# Altium PCB 2016_AdvBeacon.PCBDOC
Units mil, origin at the board's own origin, x right, y up, seen from the top; angles counter-clockwise.
Board outline 2585.03 x 2560 mil, 4 copper layers (1-TOP, 2-GND, 3-SIGNAL, 4-BOT), stack 68 mil thick; 70 components, 47 nets, 263 pads, 155 vias.
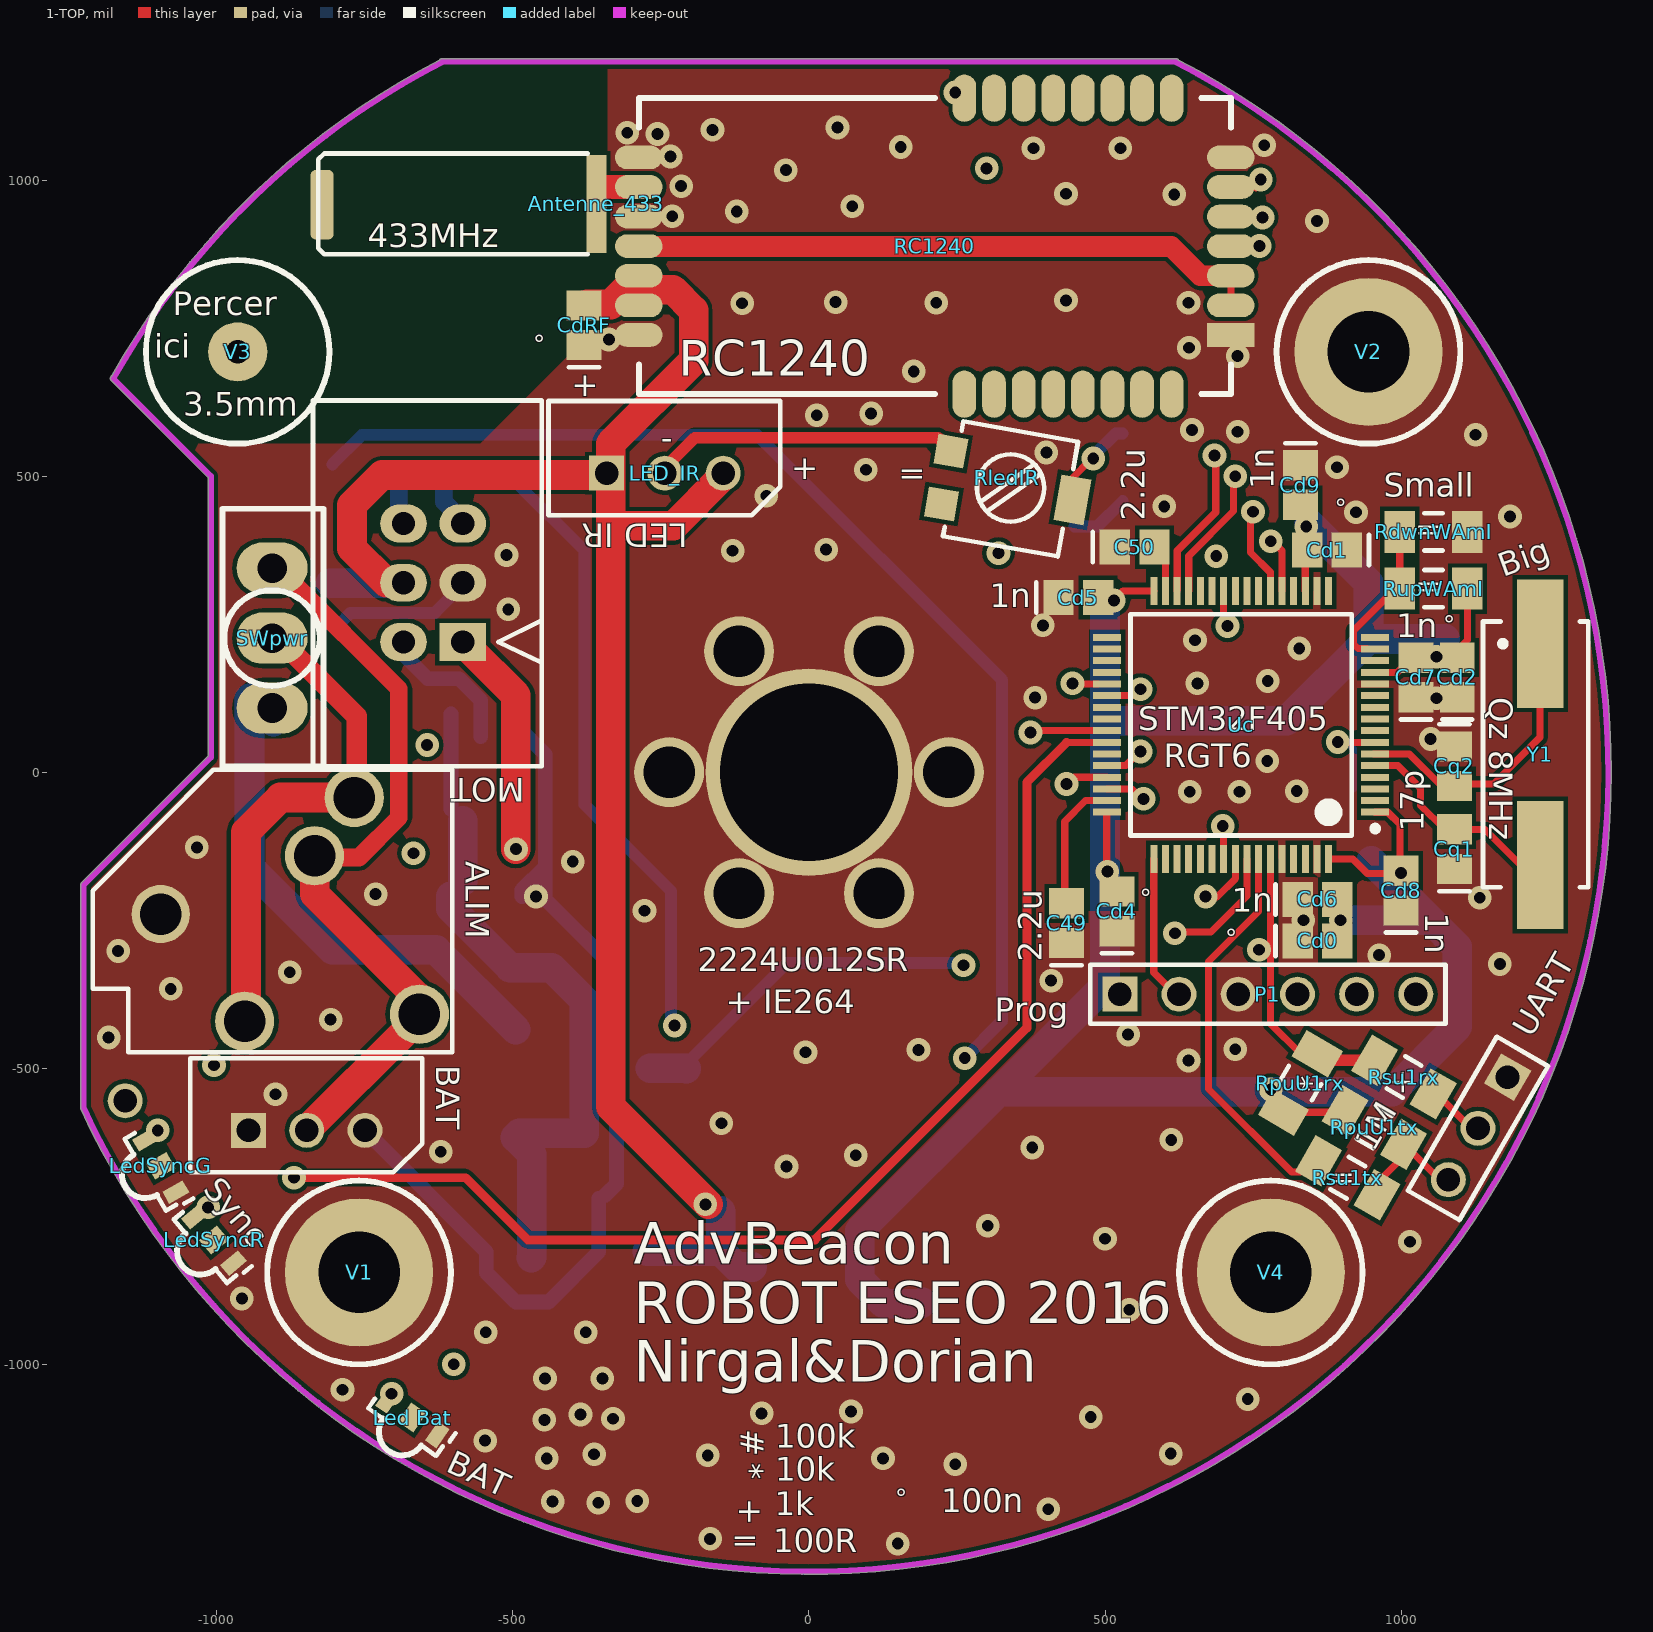
[diagram p0: 1-TOP view]
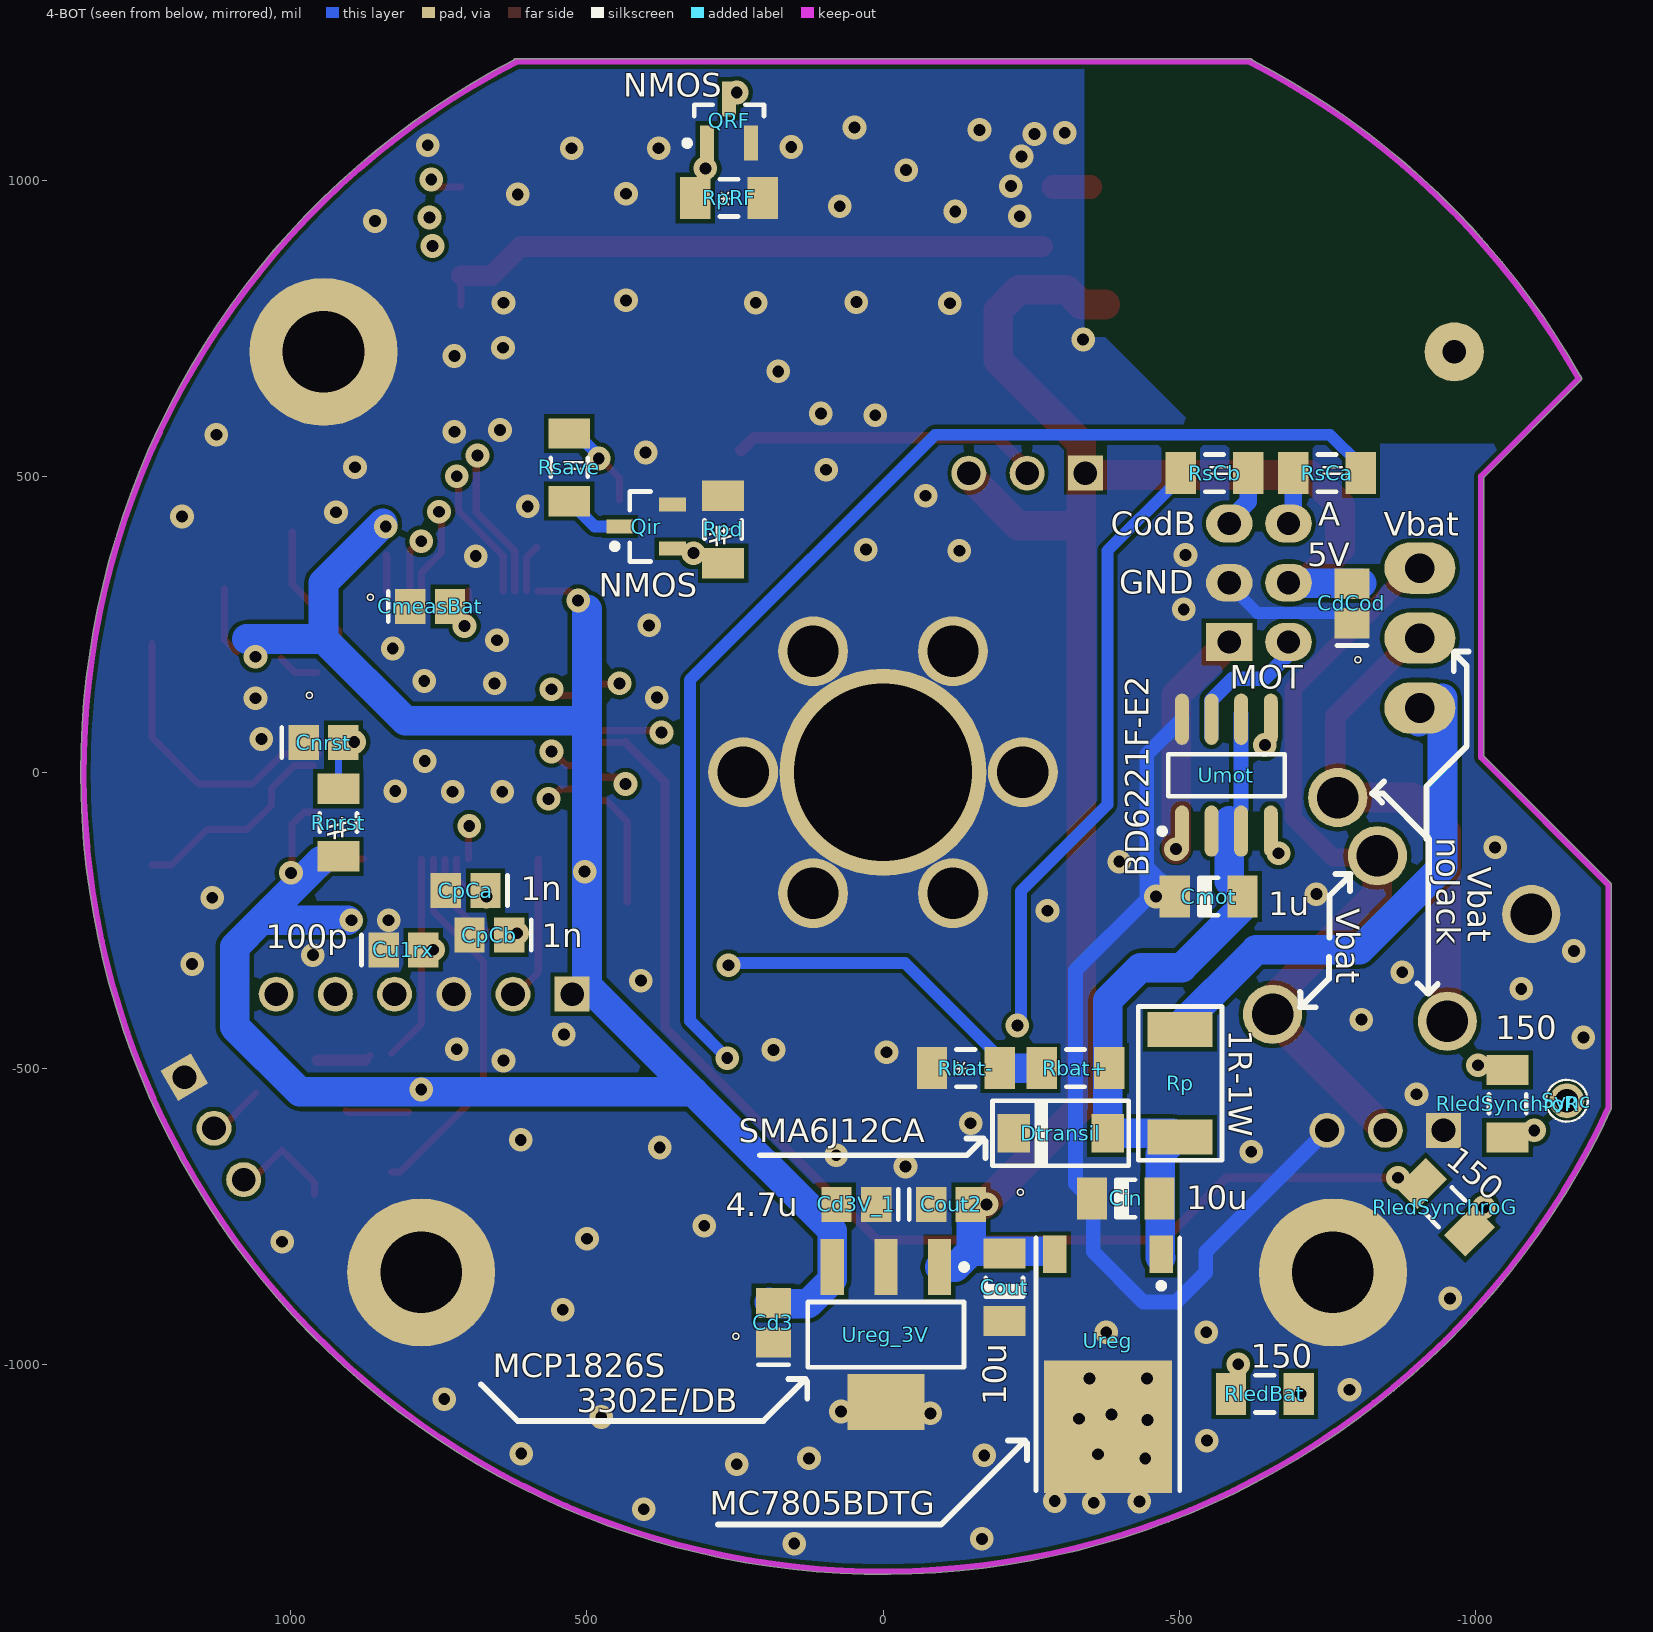
[diagram p1: 4-BOT view, seen from below]
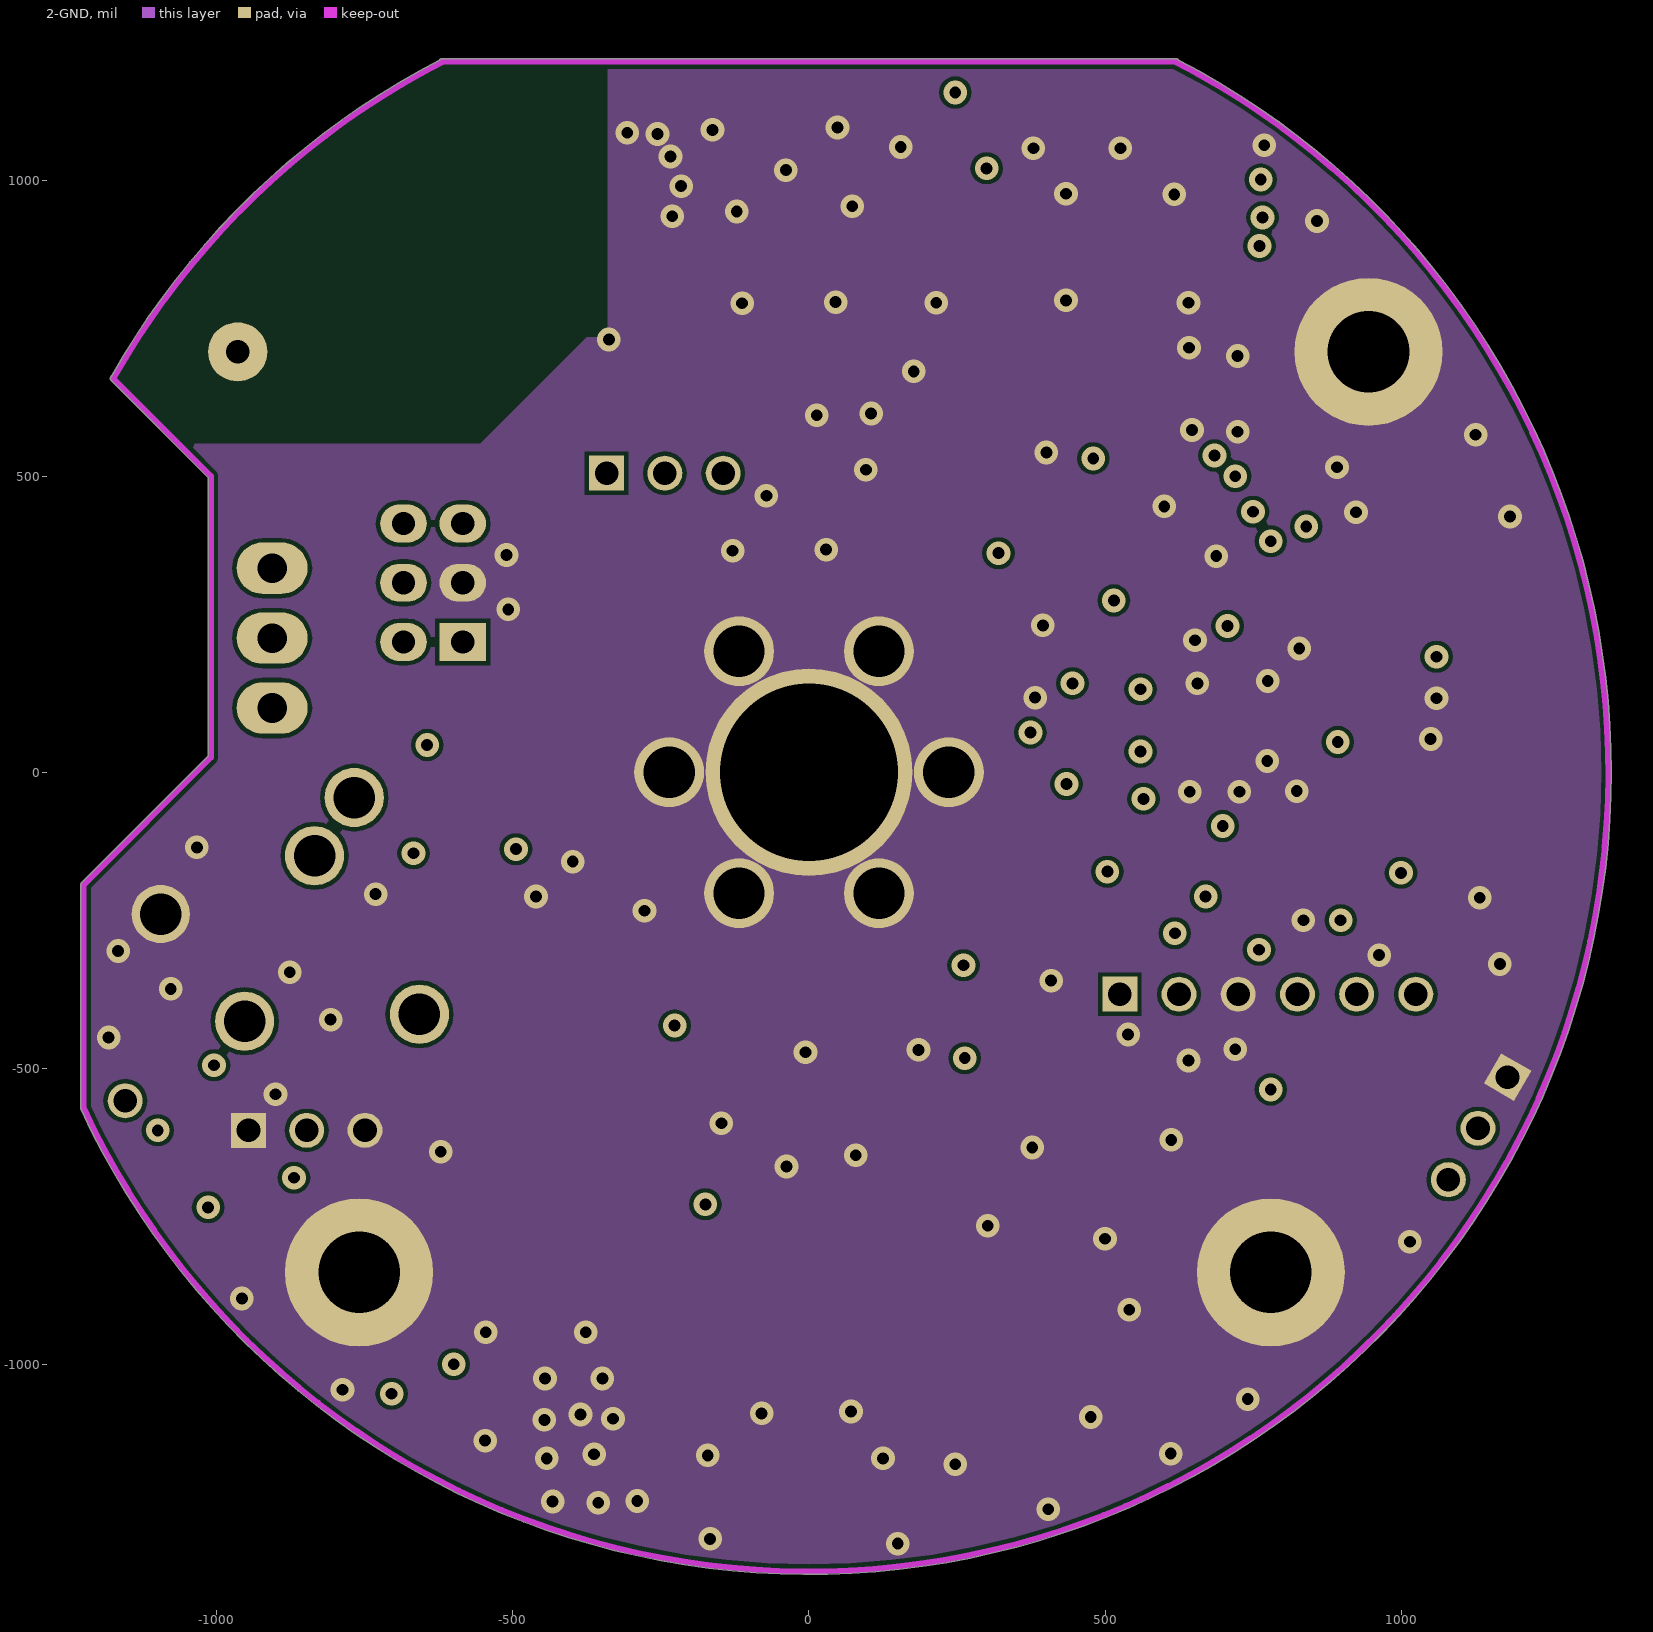
[diagram p2: 2-GND]
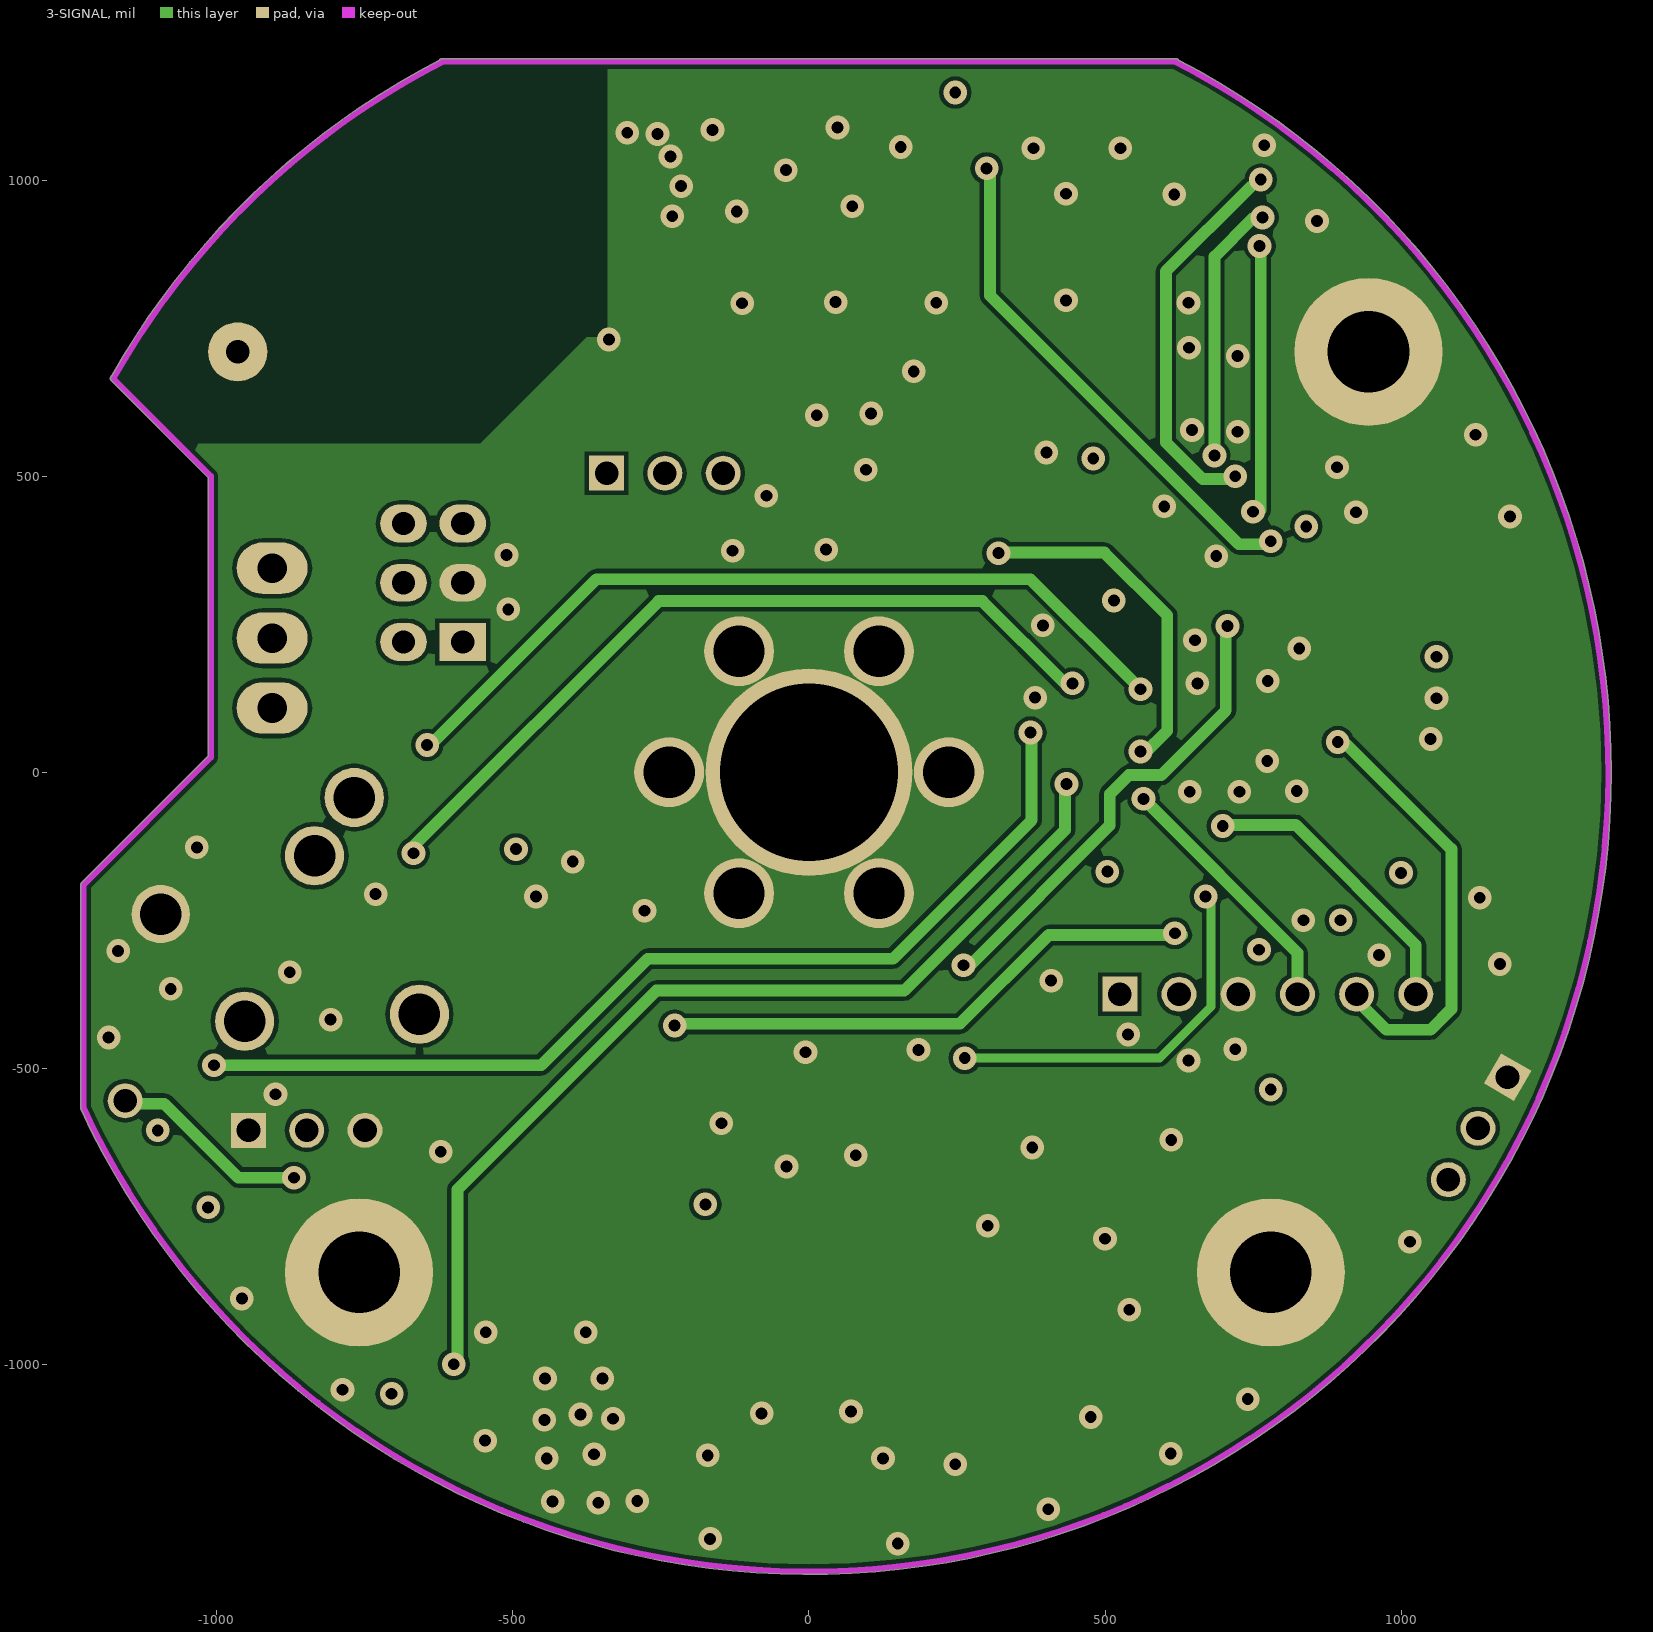
[diagram p3: 3-SIGNAL]
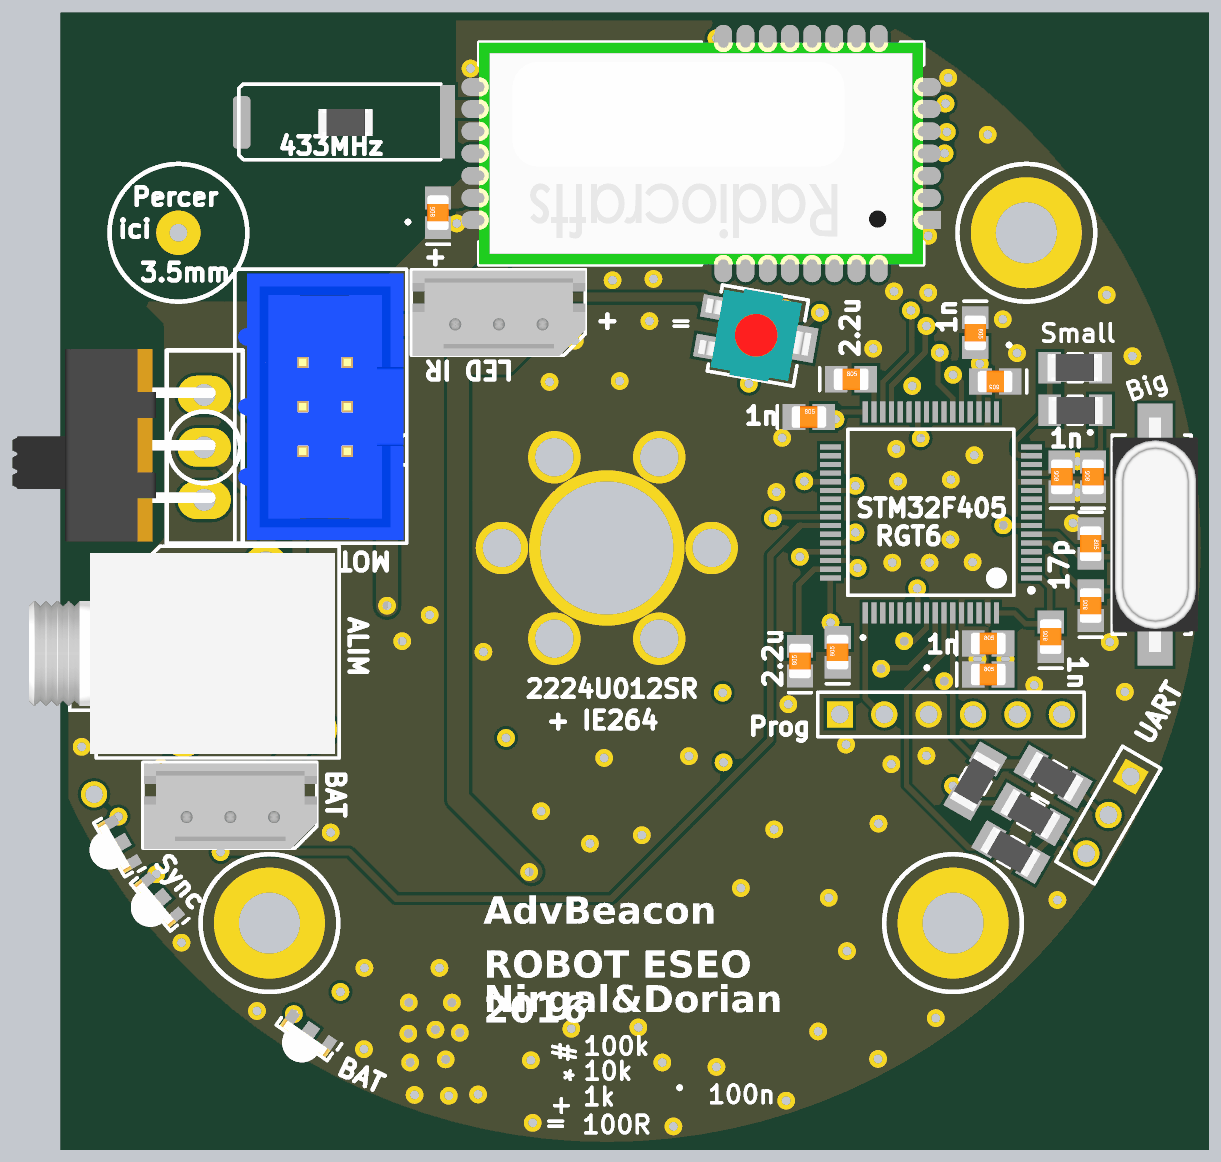
[diagram p4: 3D render of the assembled board from above, using the file's embedded part models]
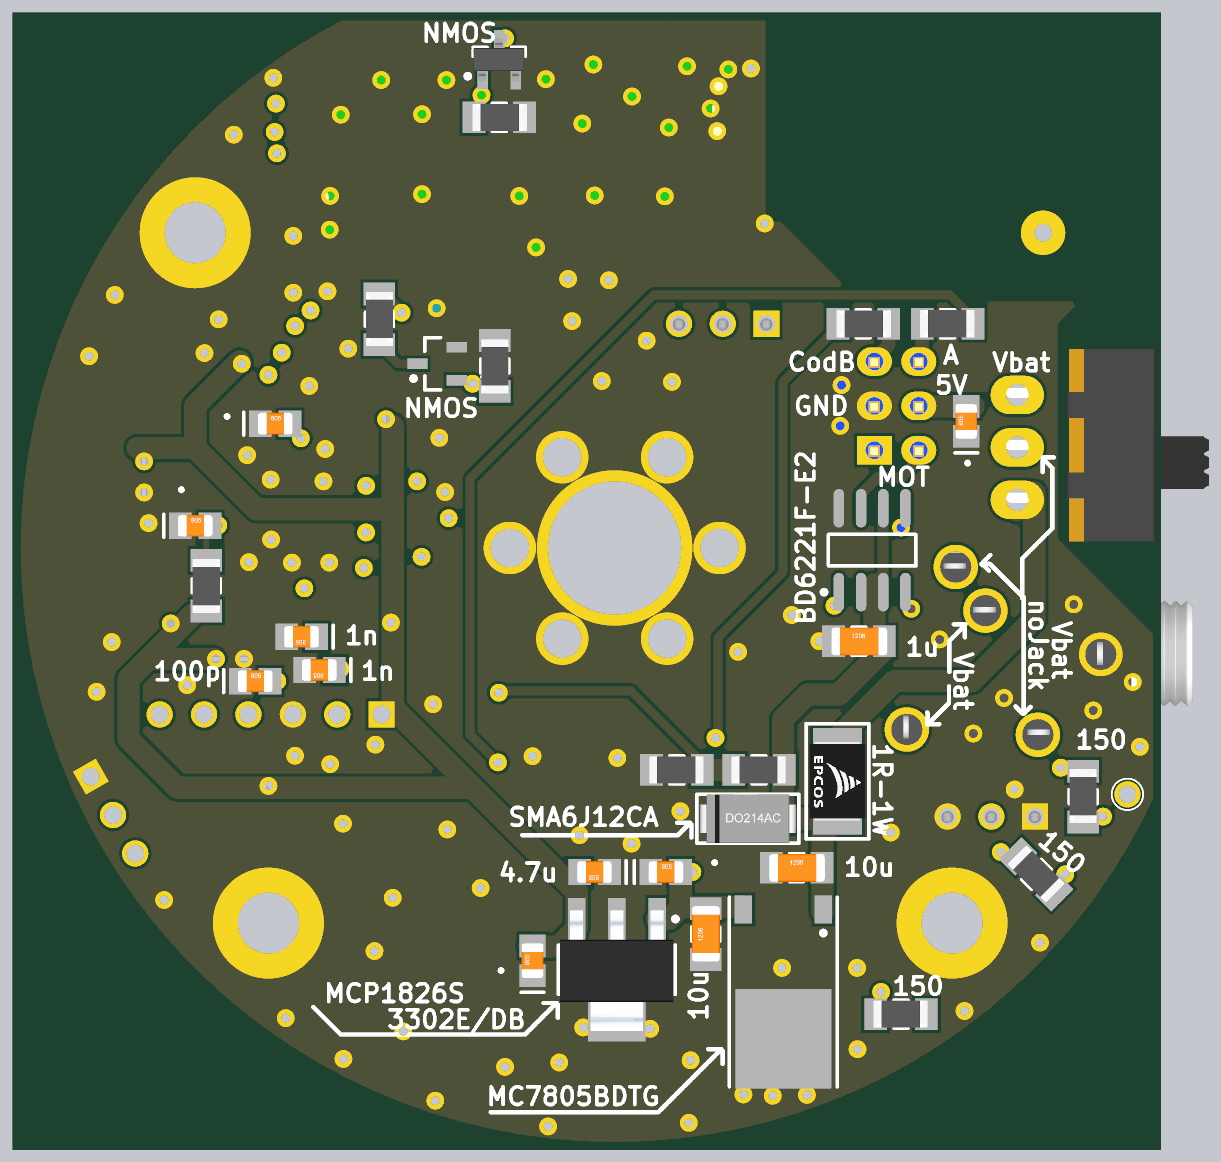
[diagram p5: 3D render of the assembled board from below, using the file's embedded part models]

## Layer stack, top to bottom
Top Solder: solder mask 0.45, Solder Resist, Dk 3.5
1-TOP: signal copper 1.4
Dielectric1: core 20.8, FR-4, Dk 4.8
2-GND: signal copper 1.4
Dielectric2: prepreg 20.8, FR-4, Dk 4.8
3-SIGNAL: signal copper 1.4
Dielectric3: core 20.8, FR-4, Dk 4.8
4-BOT: signal copper 1.4
Bottom Solder: solder mask 0.45, Solder Resist, Dk 3.5

## Board outline
-1229.88,-566.14 cw(c-1225,-565) -1230.01,-565 -1230.01,-190 cw(c-1225,-190) -1228.53,-186.44 -1228.55,-186.45 -1015.01,27.08 -1015.01,497.92 -1178.55,661.45 cw(c-1175,665) -1178.43,668.66 cw(c-1173.67,667.09) -1178.03,669.56 cw(c0,0) -624.26,1202.65 cw(c-620,1200) -620,1205.02 620,1205.02 cw(c620,1200) 624.26,1202.65 cw(c0,0) 1355.02,0 cw(c0,0) -1229.56,-569.43 cw(c-1225.01,-567.32)

## Design rules (kind name [scope] priority, off if disabled: settings)
Clearance Clearance_4 [OnLayer('Bottom Layer') And (IsThruPin Or IsSMTPin) vs OnLayer('Bottom Layer') And (IsVia)] p1 off: gap=8
Clearance Clearance_3 [OnLayer('Bottom Layer') And (IsWire) vs OnLayer('Bottom Layer') And (IsVia)] p2 off: gap=8
Clearance Clearance_2 [OnLayer('Top Layer') And (IsThruPin Or IsSMTPin Or IsVia) vs OnLayer('Top Layer') And (IsVia)] p3 off: gap=8
Clearance Clearance_1 [OnLayer('Top Layer') And (IsWire) vs OnLayer('Top Layer') And (IsVia)] p4 off: gap=8
Clearance [All] p5: gap=7
FabricationTestPointUsage TestPointUsage [All] p1: valid=0 allowmultiple=FALSE
FabricationTestpoint Testpoint [(IsPad And (OnTopLayer Or OnBottomLayer))] p1: side=3 testpointundercomponent=TRUE minsize=40 maxsize=100 preferedsize=60 minholesize=0 maxholesize=40 preferedholesize=32 testpointgrid=1 allowsidetop=TRUE allowsidebottom=TRUE usegrid=TRUE gridtolerance=0.01
PlaneConnect [All] p1: planeconnectstyle=Relief reliefexpansion=25 reliefentries=4 reliefconductorwidth=12 reliefairgap=15
PolygonConnect [All] p1: connectstyle=Direct reliefconductorwidth=10 reliefentries=4 polygonreliefangle="90 Angle" airgapwidth=10
RoomDefinition 2016_AdvBeacon [InComponentClass('2016_AdvBeacon')] p1: confinementstyle=ConfineIn formatcopy=TRUE lockcomponents=FALSE outline 5358.6,6297 4775,6297 4775,5542 5358.6,5542
RoutingLayers RoutingLayers_1 [All] p1: top layer_v5=TRUE mid layer 1_v5=FALSE mid layer 2_v5=FALSE bottom layer_v5=TRUE
RoutingLayers [All] p2: top layer_v5=TRUE mid layer 1_v5=FALSE mid layer 2_v5=FALSE bottom layer_v5=TRUE
RoutingVias [All] p1: holewidth=24 width=50 viastyle="Through Hole" minholewidth=24 minwidth=50 maxholewidth=24 maxwidth=50
SilkToSolderMaskClearance SilkscreenOverComponentPads [IsPad] p1: minsilkscreentomaskgap=10 clearancetoexposedcopper=TRUE
SolderMaskExpansion [All] p1: expansion=0
Width ALIM [InNet('0') Or InNet('VDD')] p1: maxlimit=100 minlimit=10 preferedwidth=25
Width [All] p2: maxlimit=150 minlimit=12 preferedwidth=18
24 further rules are at their usual default settings.

## Components (designator, comment, footprint, x,y, rotation, side; value= is the part's Value field where it differs from the comment)
ALIM "EMBASE_JACK_STEREO_3.5mm" "EMBASE_JACK_STEREO_3.5 mm" -1095,-405 r0 top
Antenne_433 "433MHz" R1206_N#1 -587.5,958.54 r180 top
BAT "MOLEX 22-03-5035" MOLEX3_2.5MM -750,-605 r180 top
C49 "2.2uF" C0805_N 435,-255 r90 top
C50 "2.2uF" C0805_N 550,380 r0 top
Cd0 "100nF" C0805_N 858.94,-285 r0 top
Cd1 "100nF" C0805_N 875,375 r180 top
Cd2 "100nF" C0805_N 1095,160 r90 top
Cd3 "100nF" C0805_N 185,-930 r90 bottom
Cd3V_1 "4.7u" C0805_N 45,-730 r0 bottom
Cd4 "100nF" C0805_N 520,-235 r90 top
Cd5 "1nF" C0805_N 455,295 r0 top
Cd6 "1nF" C0805_N 858.94,-215 r0 top
Cd7 "1nF" C0805_N 1025,160 r90 top
Cd8 "1nF" C0805_N 1000,-200 r90 top
Cd9 "1nF" C0805_N 830,485 r270 top
CdCod "100nF" C0805_N -792,285 r90 bottom
CdRF "100nF" C0805_N -380,755 r90 top
Cin "10uF" C1206_N -410,-720 r180 bottom
CmeasBat "100nF" C0805_N 765,280 r180 bottom
Cmot "1uF" C1206_N -550,-210 r180 bottom
Cnrst "100nF" C0805_N 945,50 r180 bottom
Cout "10uF" C1206_N -205,-870 r90 bottom
Cout2 "100nF" C0805_N -115,-730 r180 bottom
CpCa "1n" C0805_N 705,-200 r0 bottom
CpCb "1n" C0805_N 665,-275 r0 bottom
Cq1 "17pF" C0805_N 1090,-130 r90 top
Cq2 "17pF" C0805_N 1090,10 r270 top
Cu1rx "100pF" C0805_N 810,-300 r180 bottom
Dtransil "SMA6J12CA" DO214AC -300,-610 r180 bottom
"Led Bat" "LED Orange" LED_sideView_1204 -670,-1090 r325 top
LED_IR "MOLEX 22-03-5035" MOLEX3_2.5MM -145,505 r180 top
LedSyncG "LED Verte" LED_sideView_1204 -1095,-665 r300 top
LedSyncR "LED Verte" LED_sideView_1204 -1005,-790 r310 top
MOT "HE10/6_MALE_DROIT_BAS PROFIL" HE10/6_M_D_BP -685,220 r90 top
P1 "ProgSWD" HDR1X6 525,-375 r0 top
Qir "IRLML2803" SOT23_N 400,415 r0 bottom
QRF "Transistor MOSFET-N" SOT23-3N 260,1100 r90 bottom
Rbat+ "22k" R1206_N#2 -325,-500 r0 bottom
Rbat- "10k" R1206_N#2 -140,-500 r0 bottom
RC1240 "RC1240-Radiocraft" RC1240 712.5,738.54 r180 top
RdwnWAmI "0" R1206_N#2 1055,406 r180 top
RledBat "150" R1206_N#2 -645,-1050 r0 bottom
RledIR "500" TRIMMER_CMS_TS53YL 445,460 r260 top
RledSynchroG "150" R1206_N#2 -950,-735 r45 bottom
RledSynchroR "150" R1206_N#2 -1055,-560 r90 bottom
Rnrst "100k" R1206_N#2 920,-85 r270 bottom
Rp "1R-1W" INDUCTANCE_CMS_1812 -490,-435 r270 bottom
Rpd "100k" R1206_N#2 270,410 r270 bottom
RpRF "10k" R1206_N#2 260,970 r180 bottom
RpuU1rx "10k" R1206_N#2 830,-525 r240 top
RpuU1tx "1M" R1206_N#2 955,-600 r150 top
Rsave "100" R1206_N#2 530,515 r90 bottom
RsCa "100" R1206_N#2 -750,505 r0 bottom
RsCb "100" R1206_N#2 -560,505 r180 bottom
Rsu1rx "1k" R1206_N#2 1005,-515 r330 top
Rsu1tx "100" R1206_N#2 910,-685 r150 top
RupWAmI "0" R1206_N#2 1055,310 r0 top
SWpwr "SW SPDT- APEM Série 523x" "SW_UNIPOL_DROIT - Ebay - SPDT - 11x6x5" -1025,10 r0 top
Sync "Sync" "Point Test_D0.9_P0.5mm" -1155,-555 r90 bottom
UART "BARRETTE3" HDR1X3 1180,-515 r240 top
Uc "STM32F405RGT6" TQFP64_V 730,80 r180 top
Umot "BD6221F-E2" SO8_N -580,-5 r90 bottom
Ureg "MC7805BDTG" 369A-13 -380,-960 r0 bottom
Ureg_3V "MCP1826S-3302E/DB" SOT223-4N -5,-950 r270 bottom
V1 "Entretoise WURTH CMS" ENTRETOISE_CMS_DOUBLE#1 -760,-845 r0 top
V2 "Entretoise WURTH CMS" ENTRETOISE_CMS_DOUBLE#1 945,710 r0 top
V3 "Entretoise WURTH CMS" ENTRETOISE_CMS_DOUBLE#2 -965,710 r0 top
V4 "Entretoise WURTH CMS" ENTRETOISE_CMS_DOUBLE#1 780,-845 r0 top
Y1 "8 MHz" HC49/4H_SMX 1235,30 r270 top

## Footprints (in the part's own frame and the unit in brackets; to place one, negate y for a bottom-side part, rotate by r counter-clockwise, add the part's x,y. Pads: shape width x height; smd on the part's side, far side on the other; paste and mask are expansions set on the pad)
369A-13 [mm] "D-PAK/TO-252-AA; 3 Leads (1 Cropped); Body 10.3 (inc. leads) x 6.7 mm (LxW max)"
  rect 1x1.6 smd: 1(-2.285,-3.7) 3(2.285,-3.7)
  rect 5.5x5.7 smd: 4(0,3.7)
  silkscreen extent -3.09,-4.4 3.09,6.45
C0805_N [mm] "Chip Capacitor, Body 2.0x1.3mm, IPC Medium Density"
  rect 1.3x1.5 smd: 1(-0.85,0) 2(0.85,0)
  silkscreen extent -1.8,-0.65 -1.8,0.65, body extent -0.99,-0.63 1.01,0.63, height 0.8
C1206_N [mm] "Chip Capacitor, Body 3.2x1.6mm, IPC Medium Density"
  rect 1.3x1.8 smd: 1(-1.45,0) 2(1.45,0)
  silkscreen extent -0.4,-0.8 0.4,0.8, body extent -1.57,-0.81 1.63,0.79, height 1.02
DO214AC [mm] "Diode"
  rect 1.4x1.64 smd: 1(-2.015,0) 2(2.015,0)
  silkscreen extent -2.92,-1.4 2.92,1.4, body extent -2.74,-1.4 2.74,1.4, height 2.27
"EMBASE_JACK_STEREO_3.5 mm" [mm] "EMBASE JACK STEREO 3.5 mm ; 5 BROCHES ; 2 CONTACTS ET 1 GND ; FEMELLE ; COUDEE"
  round 2.5 hole 1.778: 1(0,4.2)
  round 2.54 hole 1.778: 2(8.3,9.2) 3(6.6,6.7) 4(3.6,-0.4) 5(11.1,-0.1)
  silkscreen extent -2.92,-1.73 12.5,10.39, body extent -5.25,-1.5 12.25,10, height 6
ENTRETOISE_CMS_DOUBLE#1 [mm] "Entretoise CMS Wurth trou 4.4mm"
  round 6.35 hole 3.5: 1(0,0)
  silkscreen extent -3.94,-3.94 3.94,3.94
ENTRETOISE_CMS_DOUBLE#2 [mm] "Entretoise CMS Wurth trou 4.4mm"
  round 2.54 hole 1.016: 1(0,0)
  silkscreen extent -3.94,-3.94 3.94,3.94
HC49/4H_SMX [mm] "Quartz Crystal, SM; Body 13.4 (inc. leads) x 4.9 mm (LxW max)"
  rect 5.5x2 smd: 1(-4.75,0) 2(4.75,0)
  silkscreen extent -5.7,-2.45 5.7,2.06, body extent -6.7,-2.45 6.7,2.45, height 5.08
HDR1X3 [mm] "Connector; Header; 3 Position"
  rect 1.5x1.5 hole 1.016: 1(0,0)
  round 1.5 hole 1.016: 2(2.54,0) 3(5.08,0)
  silkscreen extent -1.27,-1.27 6.35,1.27
HDR1X6 [mm] "Connector; Header; 6 Position"
  rect 1.5x1.5 hole 1.016: 1(0,0)
  round 1.5 hole 1.016: 2(2.54,0) 3(5.08,0) 4(7.62,0) 5(10.16,0) 6(12.7,0)
  silkscreen extent -1.27,-1.27 13.97,1.27
HE10/6_M_D_BP [mm] "HE10 ; 6 CONTACTS ; MALE ;  DROIT; BAS PROFIL ; ESPACEMENTS BROCHES = 2.54 mm"
  rect 1.63x2 hole 1: 1(0,-2.54)
  oval 1.63x2 hole 1: 2(0,0) 3(2.54,-2.54) 4(2.54,0) 5(5.08,-2.54) 6(5.08,0)
  silkscreen extent -5.33,-5.94 10.36,3.88, body extent -5.13,-5.75 10.11,3.69, height 9.1
INDUCTANCE_CMS_1812 [mm] "INDUCTANCE CMS 1812 ; DIMENSIONS : 4.5mm x 3.2mm"
  rect 1.5x2.8 smd: 1(0,0.3) 2(4.6,0.3)
  silkscreen extent -1,-1.5 5.6,2.1, body extent 0.05,-1.3 4.55,1.9, height 3.24
LED_sideView_1204 [mm] "SM LED; 2 Flat Leads"
  rect 0.8x1 smd: 0(0,0)
  rect 0.6x1 smd: 1(-1.3,0) 2(1.3,0)
  silkscreen extent -1.78,-1.76 1.91,0.51, body extent -1.6,-1.65 1.6,0.64, height 1.2
MOLEX3_2.5MM [mm] "Ref Molex : 22-03-5035 - 3 voies - 2.5mm"
  rect 1.5x1.5 hole 1.016: 1(5,0)
  round 1.5 hole 1.016: 2(2.5,0) 3(0,0)
  silkscreen extent -2.45,-3.1 7.49,1.8, body extent -2.46,-3.05 7.44,1.85, height 5.92
"Point Test_D0.9_P0.5mm" [mm] "Test point for PCB_Hole 0.5mm"
  round 1.5 hole 1: 1(0,0)
  silkscreen extent -0.9,-0.89 0.9,0.9
R1206_N#1 [mm] "Chip Resistor, Body 3.2x1.6mm, IPC Medium Density"
  rect 0.85x4.2 smd: 1(-5.804,-0.038)
  silkscreen extent -5.42,-2.2 6.13,2.12, body extent -1.68,-0.87 1.68,0.88, height 0.71
R1206_N#2 [mm] "Chip Resistor, Body 3.2x1.6mm, IPC Medium Density"
  rect 1.3x1.8 smd: 1(-1.45,0) 2(1.45,0)
  silkscreen extent -0.4,-0.8 0.4,0.8, body extent -1.68,-0.87 1.68,0.87, height 0.71
RC1240 [mil]
  round 40 on Top Overlay: 0(50,50)
  rect 80x40 smd: 1(0,0)
  oval 80x40 smd: 2(0,-50) 3(0,-100) 4(0,-150) 5(0,-200) 6(0,-250) 7(0,-300) 8(1000,-300) 9(1000,-250) 10(1000,-200) 11(1000,-150) 12(1000,-100) 13(1000,-50) 14(1000,0)
  oval 40x80 smd: 15(100,-400) 16(150,-400) 17(200,-400) 18(250,-400) 19(300,-400) 20(350,-400) 21(400,-400) 22(450,-400) 23(450,100) 24(400,100) 25(350,100) 26(300,100) 27(250,100) 28(200,100) 29(150,100) 30(100,100)
  silkscreen extent 0,-400 1000,100, body extent 0,-400 1000,100, height 138
SO8_N [mm] "SOIC, 8-Leads, Body 4.9x3.9mm, Pitch 1.27mm, IPC Medium Density"
  oval 2.2x0.6 smd: 1(-2.4,1.905) 2(-2.4,0.635) 3(-2.4,-0.635) 4(-2.4,-1.905) 5(2.4,-1.905) 6(2.4,-0.635) 7(2.4,0.635) 8(2.4,1.905)
  silkscreen extent -2.52,-2.5 0.9,2.88, body extent -2,-2.5 2,2.5, height 1.75
SOT23-3N [mm] "SOT23, 3-Leads, Body 2.9x1.3mm, Pitch 0.95mm, Lead Span 2.5mm, IPC Medium Density"
  rect 1.5x0.6 smd: 1(-0.95,0.95) 2(-0.95,-0.95) 3(0.95,0)
  silkscreen extent -1.07,-1.5 0.7,1.93, body extent -1.24,-1.5 1.23,1.5, height 1.1
SOT23_N [mm] "SOT23, 3-Leads, Body 2.9x1.3mm, Pitch 0.95mm, Lead Span 2.3mm - Reverse Pinning, IPC Medium Density"
  rect 1.15x0.6 smd: 1(-1.125,0.95) 2(-1.125,-0.95) 3(1.125,0)
  silkscreen extent -0.2,-1.5 1.48,1.5, body extent -0.7,-1.5 0.7,1.5, height 1.1
SOT223-4N [mm] "SOT223/SC73, 4-Leads, Body 6.5x3.5mm, Pitch 2.3mm, Lead Span 7mm, IPC Medium Density"
  rect 2.4x1 smd: 1(-2.9,2.3) 2(-2.9,0) 3(-2.9,-2.3)
  rect 2.4x3.3 smd: 4(2.9,0)
  silkscreen extent -3.02,-3.35 1.4,3.47, body extent -3.39,-3.35 3.5,3.35, height 1.8
"SW_UNIPOL_DROIT - Ebay - SPDT - 11x6x5" [mm] "SW_UNIPOL_DROIT - Ebay - SPDT - 11x6x5"
  oval 3.048x2.2 hole 1.27: COMMON1(3,5.5) NC1(3,8.5) NO1(3,2.5)
  silkscreen extent 0.86,0 5.21,11.05, body extent -7.96,0.13 3.64,11.13, height 3.3
TQFP64_V [mm] "Thin QFP, 64-Leads, Body 10x10mm, Pitch 0.5mm, ST Recommended"
  rect 1.2x0.3 smd: 1(-5.75,3.75) 2(-5.75,3.25) 3(-5.75,2.75) 4(-5.75,2.25) 5(-5.75,1.75) 6(-5.75,1.25) 7(-5.75,0.75) 8(-5.75,0.25) 9(-5.75,-0.25) 10(-5.75,-0.75) 11(-5.75,-1.25) 12(-5.75,-1.75) 13(-5.75,-2.25) 14(-5.75,-2.75) 15(-5.75,-3.25) 16(-5.75,-3.75) 33(5.75,-3.75) 34(5.75,-3.25) 35(5.75,-2.75) 36(5.75,-2.25) 37(5.75,-1.75) 38(5.75,-1.25) 39(5.75,-0.75) 40(5.75,-0.25) 41(5.75,0.25) 42(5.75,0.75) 43(5.75,1.25) 44(5.75,1.75) 45(5.75,2.25) 46(5.75,2.75) 47(5.75,3.25) 48(5.75,3.75)
  rect 0.3x1.2 smd: 17(-3.75,-5.75) 18(-3.25,-5.75) 19(-2.75,-5.75) 20(-2.25,-5.75) 21(-1.75,-5.75) 22(-1.25,-5.75) 23(-0.75,-5.75) 24(-0.25,-5.75) 25(0.25,-5.75) 26(0.75,-5.75) 27(1.25,-5.75) 28(1.75,-5.75) 29(2.25,-5.75) 30(2.75,-5.75) 31(3.25,-5.75) 32(3.75,-5.75) 49(3.75,5.75) 50(3.25,5.75) 51(2.75,5.75) 52(2.25,5.75) 53(1.75,5.75) 54(1.25,5.75) 55(0.75,5.75) 56(0.25,5.75) 57(-0.25,5.75) 58(-0.75,5.75) 59(-1.25,5.75) 60(-1.75,5.75) 61(-2.25,5.75) 62(-2.75,5.75) 63(-3.25,5.75) 64(-3.75,5.75)
  silkscreen extent -5.87,-4.75 4.75,4.75, body extent -5,-5 5,5, height 1.6
TRIMMER_CMS_TS53YL [mm] "TRIMMER CMS TS53YL ; DIMENSIONS : 6.2mm x 5mm ; ESPACEMENT BROCHES : 4.2mm ET 1mm"
  rect 1.3x1.3 smd: 1(-1.15,-5.5) 3(1.15,-5.5)
  rect 2x1.3 smd: 2(0,0)
  silkscreen extent -2.5,-5.2 2.5,-0.2, body extent -2.5,-5.9 2.5,0.3, height 2.55

## Part data
ALIM: "EMBASE JACK STEREO 3.5mm"
Antenne_433: library part Resistor, "CAN4311129200431K"
BAT LED_IR: library part BARRETTE3, "Header, 3-Pin"
C49 C50 Cd0 Cd1 Cd2 Cd3 Cd4 Cd5 Cd6 Cd7 Cd8 Cd9 Cmot Cnrst CpCa CpCb Cq1 Cq2 Cu1rx: library part Condensateur, "Capacitor"
Cd3V_1 CdCod CdRF Cin CmeasBat Cout Cout2: library part Capacitor, "Capacitor"
Dtransil: library part "Diode 1N4001", "1 Amp General Purpose Rectifier"
"Led Bat" LedSyncG LedSyncR: library part LED, "Typical LED"
MOT: "EMBASE HE10/6 MALE DROIT BAS PROFIL"
P1: library part "Header 6", "Header, 6-Pin"
Qir: "HEXFET Power MOSFET"
QRF: "N-Channel MOSFET"
Rbat+ Rbat- RdwnWAmI RledBat RledSynchroG RledSynchroR Rnrst Rp Rpd RpRF RpuU1rx RpuU1tx Rsave RsCa RsCb Rsu1rx Rsu1tx RupWAmI: library part Resistor, "Resistor"
RC1240: "RC1240 - Radiocraft 433MHz Transceiver"
RledIR: library part "Trimmer monotour, Bourns,serie 3314P", "Trimmer monotour, Bourns,serie 3314P"
SWpwr: "Switch unipolaire a levier"
Sync: library part "Point Test", "Point test"
UART: "Header, 3-Pin"
Uc: "ARM Cortex-M4 32b MCU+FPU, 210DMIP, 1024 kB Flash, 192+4 kB RAM, 51 I/Os, 64-pin LQFP, -40 to +85°C, Tray"
Umot: library part BD6220F, "H Bridge - 2A"
Ureg: library part MC7805ACD2T, "Three-Terminal Positive Voltage Regulator"
Ureg_3V: "1000 mA, Low Voltage, Low Quiescent Current LDO Regulator, 3-Pin SOT-223, Extended Temperature"
V1 V2 V3 V4: "Entretoise Wurth"
Y1: library part Quartz, "Crystal Oscillator"

## Free pads (board coordinates)
  rrect50% 39.37x118.11 smd: 0(-822.5,958.54)
  round 118.11 hole 86.61: 0(-236.22,0) 0(-118.11,-204.33) 0(-118.11,204.33) 0(118.11,-204.33) 0(118.11,204.33) 0(236.22,0)
  round 350 hole 300: 1(0,0)

## Via types
v1: diameter 40, hole 20, 1-TOP to 4-BOT, 155 vias

## Nets (pads, with @x,y where several pads share a name; then routed paths per layer and width w, separated by ;. In a path a pad name is that pad's centre, name@x,y a point inside that pad or via, vN(x,y) a via of type N, cw(c..) or ccw(c..) an arc to the next point about the centre after c; other vN are vias at no path point)
3V3: Cd0.2 Cd1.2 Cd2.2 Cd3.2 Cd3V_1.2 Cd4.2 Cd5.2 Cd6.2 Cd7.2 Cd8.2 Cd9.2 P1.1 Rnrst.2 RpuU1rx.2 RpuU1tx.2 RupWAmI.2 Uc.1 Uc.13 Uc.19 Uc.32 Uc.48 Uc.64 Ureg_3V.3 | length 4419.7
  1-TOP w12: Uc.48@503,-72 503,-184.54 Cd4.2 ; v1@515,291 530.38,306.38 Uc.32 ; RpuU1rx.2 904.56,-574.44 RpuU1tx.2@907,-572 ; Uc.19 838.27,366.27 Cd1.2@839,367 ; Uc.64 918.38,-146.38 943,-171 Cd8.2@991,-171 ; Uc.1 977.64,-67.64 998,-88 Cd8.2@998,-166.54 ; Uc.13 993.58,168.58 Cd7.2@1017,192 ; Cd2.2@1092,203 1112.09,223.09 RupWAmI.2
  4-BOT w50: Cd3.2@192,-895 189,-898 127,-898 85.55,-856.55 Ureg_3V.3 85.55,-774.45 320,-540 ; 500,275 500,85 ; v1@845,420 945,320 945,225 ; v1@904,-250 1050,-250 ; Rnrst.2@950,-150 1050,-250 ; 1075,225 945,225 ; 320,-540 985,-540 1095,-430 1095,-295 1050,-250 ; 320,-540 500,-360 500,85 ; 500,85 502,87 807,87 945,225
  other v1: 780,-536 898,-250 1000,-170 504,-168 1060,195 515,290 840,415
5V: CdCod.2 CdRF.2 Cout2.2 Cout.2 LED_IR.1 LED_IR.3 MOT.4 RC1240.12 RC1240.13 Ureg.3 Ureg_3V.1 | length 3072.3
  1-TOP w12: MOT.4@-714,320 MOT.4 ; LED_IR.1@-350,502 LED_IR.1@-349,501 ; -336,446 -335,445 -306,416
  1-TOP w50: MOT.4@-714,320 -772,378 -772,451 -721,502 LED_IR.1@-350,502 ; CdRF.2@-375,790 -335,790 -310,815 -230,815 -195,780 -195,695 -335,555 -335,445 -335,-565 v1@-170,-730 ; -306,416 -229,416 -145,500 LED_IR.3
  4-BOT w50: CdCod.2@-808.4,319 MOT.4@-706,319 ; Ureg.3@-273,-809 -149,-809 ; Cout2.2@-150,-741 -149,-742 -149,-809 ; Ureg_3V.1 -122.17,-835.83 -149,-809
  other v1: -175,-730
ANTENNA: Antenne_433.1 RC1240.9 | length 62.5
  1-TOP w40: Antenne_433.1@-350,988.54 RC1240.9
CODA: MOT.6 RsCa.2 | length 76.7
  4-BOT w12: MOT.6@-692.91,440.91 MOT.6@-684,432
  4-BOT w30: MOT.6@-692.91,440.91 RsCa.2
CODB: MOT.5 RsCb.2 | length 89
  4-BOT w30: RsCb.2 -617.09,457.09 MOT.5@-588,428
GND: "Led Bat.2" ALIM.1 BAT.1 BAT.3 C49.1 C50.1 Cd0.1 Cd1.1 Cd2.1 Cd3.1 Cd3V_1.1 Cd4.1 Cd5.1 Cd6.1 Cd7.1 Cd8.1 Cd9.1 CdCod.1 CdRF.1 Cin.1 CmeasBat.1 Cmot.1 Cnrst.1 Cout2.1 Cout.1 CpCa.2 CpCb.2 Cq1.1 Cq2.1 Cu1rx.1 Dtransil.1 LedSyncG.2 LedSyncR.2 MOT.3 P1.3 pad.0@118.11,204.33 pad.0@118.11,-204.33 pad.0@236.22,0 pad.0@-118.11,204.33 pad.0@-118.11,-204.33 pad.0@-236.22,0 pad.1 Qir.2 QRF.2 Rbat-.2 RC1240.1 RC1240.7 RC1240.8 RC1240.10 RC1240.14 RdwnWAmI.1 Rpd.1 RpRF.2 UART.1 Uc.12 Uc.18 Uc.60 Uc.63 Umot.8 Ureg.4 Ureg_3V.2 Ureg_3V.4 V1.1 V2.1 V4.1 | length 1836
  4-BOT w20: CdCod.1 -774.45,269.09 -631.91,269.09 MOT.3@-594,307
  4-BOT w25: BAT.3 -545,-810 -545,-845 -495,-895 -440,-895 -355,-810 Cin.1@-355,-720 ; Umot.8 -445.51,30 -445.51,-159.51 ; Cmot.1@-485,-210 -485,-199 -445.51,-159.51 ; Cin.1@-345,-715 -325,-695 -325,-335 -445.51,-214.49 -445.51,-159.51
  other v1: 150,-1303 -167,-1295 404,-1245 -356,-1234 -433,-1232 -290,-1231 247,-1169 -443,-1159 125,-1159 -171,-1154 -363,-1152 611,-1151 -547,-1129 -447,-1094 -331,-1092 476,-1089 -386,-1085 -80,-1083 71,-1080 741,-1059 -788,-1043 -446,-1024 -349,-1024 -546,-946 -377,-946 541,-908 -958,-889 1015,-793 500,-788 302,-766 -38,-666 79,-647 -622,-641 377,-634 612,-621 -148,-593 -901,-544 641,-487 -6,-473 185,-469 720,-468 -1183,-448 539,-443 -808,-418 -1078,-366 409,-352 -877,-338 1167,-324 963,-309 -1167,-302 835,-250 -278,-234 1133,-212 -461,-210 -732,-206 -399,-151 -1034,-127 643,-33 727,-33 824,-32 774,19 1050,56 1060,125 382,126 656,150 775,154 828,209 652,223 395,248 -508,275 688,365 -511,367 -129,374 29,376 1184,432 924,439 600,449 -72,467 96,511 892,515 401,540 1126,570 724,575 647,578 13,603 105,606 177,677 724,703 642,717 -338,731 -113,792 215,793 641,793 45,794 434,797 858,931 -231,939 -122,947 73,956 617,976 434,977 -216,990 -39,1017 -234,1040 379,1054 526,1054 155,1056 769,1059 -256,1078 -307,1080 -163,1085 48,1089
MOT1: MOT.1 Umot.1 | length 373.1
  1-TOP w50: MOT.1@-575,210 -495,130 v1(-495,-130)
MOT2: MOT.2 Umot.7 | length 237.4
  4-BOT w25: MOT.2@-682,214 -682,196 -644,158 -591,158 -554.51,121.51 Umot.7@-554.51,60.49
NetC49_2: C49.2 Uc.47 | length 222.1
  1-TOP w12: C49.2@432,-219 432,-83 467.05,-47.95 Uc.47
NetC50_2: C50.2 Uc.31 | length 80.7
  1-TOP w12: C50.2@585,380 602.05,362.95 Uc.31
NetCq1_2: Cq1.2 Uc.5 Y1.2 | length 359.6
  1-TOP w12: Uc.5@962,11 995,11 1033,-27 1033,-56 1074,-97 1142,-97 1202.01,-157.01 Y1.2
NetCq2_2: Cq2.2 Uc.6 Y1.1 | length 492.9
  1-TOP w12: Uc.6@954,31 1014,31 1065,-20 1156,-20 1235,59 Y1.1
"NetLed Bat_1": "Led Bat.1" RledBat.1
  other v1: -705,-1050
NetLED_IR_2: LED_IR.2 RledIR.1 | length 513.5
  1-TOP w12: RledIR.1 RledIR.1@239.62,543.38
  1-TOP w20: LED_IR.2@-243,515 -193,565 218,565 RledIR.1@239.62,543.38
NetLedSyncG_1: LedSyncG.1 RledSynchroR.1
  other v1: -1100,-605
NetLedSyncR_1: LedSyncR.1 RledSynchroG.1
  other v1: -1015,-735
NetQir_3: Qir.3 Rsave.1 | length 99.8
  4-BOT w20: Qir.3@448,415 487.09,415 Rsave.1
NetQRF_3: QRF.3 RC1240.22
  other v1: 247,1148
NetRledIR_2: RledIR.2 Rsave.2 | length 142.4
  1-TOP w12: RledIR.2 445,497 v1@476,528
  4-BOT w20: v1@483,537 518.09,572.09 Rsave.2
  other v1: 480,530
NetRp_1: Rp.1 SWpwr.NO1 | length 905.5
  4-BOT w50: SWpwr.NO1@-905,85 -945,125 -945,-160 -805,-300 -630,-300 Rp.1@-495,-435
NetRpuU1tx_1: RpuU1tx.1 Rsu1tx.1 UART.3 | length 183.6
  1-TOP w12: Rsu1tx.1@960,-713 960,-693 1015,-638 1065.21,-688.21 UART.3
NetRsu1rx_2: Rsu1rx.2 UART.2 | length 95.7
  1-TOP w12: Rsu1rx.2@1059,-542 1118.6,-601.6 UART.2
PA0_BP: Uc.14
PA1_WHO_AM_I: RdwnWAmI.2 RupWAmI.1 Uc.15 | length 248.4
  1-TOP w12: Uc.15@943,208.73 927.37,208.73 919.76,216.35 919.76,238.93 997.91,317.09 RdwnWAmI.2
PA5_RF_RESET: QRF.1 RpRF.1 Uc.21 | length 945.3
  1-TOP w12: v1@785,388 798.9,374.1 Uc.21
  3-SIGNAL w20: v1@306,1015 306,805 726,385 v1@780,385
  other v1: 780,390 300,1020
PA6_RF_CONFIG: RC1240.4 Uc.22 | length 597.1
  1-TOP w12: v1@746,443 746,371 779.21,337.79 Uc.22
  3-SIGNAL w20: v1@760,440 763,443 763,877 v1@769,883
  other v1: 750,440 760.85,888.94
PA8_LEDSYNCHROR: RledSynchroR.2 Uc.41 | length 1829.1
  1-TOP w12: v1@375.03,70.5 Uc.41@503.59,70.5
  3-SIGNAL w20: v1(-1005,-495) -452.33,-495 -272.33,-315 142,-315 376,-81 v1@376,67
  other v1: 374,67
PA9_LEDSYNCHROG: RledSynchroG.2 Sync.1 Uc.42 | length 2341.5
  1-TOP w12: 433.47,50.47 Uc.42
  1-TOP w15: v1@-875,-685 -580,-685 -475,-790 10,-790 368,-432 368,-17 435,50
  3-SIGNAL w20: Sync.1@-1155,-560 -1089,-560 -964,-685 v1@-880,-685
  other v1: -870,-685
PA11_PWM_LEDIR: Qir.1 Rpd.2 Uc.44 | length 648.8
  1-TOP w12: Uc.44 535.1,11.1 v1@559,35
  3-SIGNAL w20: v1@327,371 499,371 605,265 605,70 565,30 v1@555,30
  other v1: 560,35 320,370
PA12_LED_BAT: RledBat.2 Uc.45 | length 1719.1
  1-TOP w12: v1@437,-19 447.42,-8.58 Uc.45
  3-SIGNAL w20: v1@-599,-998 -594,-993 -594,-705 -258,-369 161,-369 432.5,-97.5 v1@432.5,-22.5
  other v1: -600,-1000 435,-20
PB0_AN8_MEASVBAT: CmeasBat.2 Rbat+.2 Rbat-.1 Uc.26 | length 1427.6
  1-TOP w12: v1@700,265 700.47,265.47 Uc.26
  3-SIGNAL w20: v1@273,-325 508,-90 508,-37 540,-5 595,-5 704,104 704,243 v1@708,247
  4-BOT w20: Rbat-.1 -197.09,-482.09 -37,-322 v1@259,-322
  4-BOT w50: Rbat+.2 -208,-500 Rbat-.1@-207,-501
  other v1: 261,-326 707,247
PB4_CODA: CpCa.1 RsCa.1 Uc.56 | length 2725.1
  1-TOP w12: v1@668,-212 668,-211 689,-211 720.16,-179.84 Uc.56
  3-SIGNAL w15: v1@264,-491 272,-483 592,-483 679,-396 679,-223 v1@672,-216
  4-BOT w20: RsCa.1@-805,520 -755,570 -88,570 326,156 326,-420 v1(263,-483)
  other v1: 670,-210
PB5_CODB: CpCb.1 RsCb.1 Uc.57 | length 2144.1
  1-TOP w12: v1@632,-271 633,-270 679,-270 739.84,-209.16 Uc.57
  3-SIGNAL w20: v1@-230,-425 255,-425 405,-275 v1@630,-275
  4-BOT w20: RsCb.1@-495,490 -379,374 -379,-55 -233,-201 -233,-423 v1@-230,-426
  other v1: -227,-428 618,-272
PB6_U1TX: Rsu1tx.2 Uc.58 | length 636.6
  1-TOP w12: Uc.58 759.53,-235.47 675,-320 675,-535 815,-675 Rsu1tx.2@830,-675
PB7_U1RX: Cu1rx.2 RpuU1rx.1 Rsu1rx.1 Uc.59 | length 441.3
  1-TOP w12: Uc.59 779.21,-424.21 RpuU1rx.1@830,-475 ; RpuU1rx.1@867,-479 RpuU1rx.1@874.46,-486.46
  1-TOP w20: RpuU1rx.1@874.46,-486.46 Rsu1rx.1
  other v1: 760,-300
PB10_U3TX_RF: RC1240.6 Uc.29 | length 906
  1-TOP w12: Uc.29 641.42,365.42 717,441 v1@717,504 ; RC1240.6 753.46,988.54 v1@755,987
  3-SIGNAL w20: v1@720,495 665,495 603,557 603,846 746,989
  other v1: 720,500 763,1001
PB11_U3RX_RF: RC1240.5 Uc.30 | length 685.2
  1-TOP w12: Uc.30 622.06,306.7 622.06,374.06 687,439 v1@687,534
  3-SIGNAL w20: v1@685,540 685,871 749,935 v1@758,935
  other v1: 685,535 766,937
PC6_PWM1_FIN: Uc.37 Umot.4 | length 1383.2
  1-TOP w12: v1@451.06,149 Uc.37@488,149
  3-SIGNAL w20: v1@-671,-128 -254,289 293,289 432,150 v1(445,150)
  other v1: -668,-137
PC7_PWM2_RIN: Uc.38 Umot.5 | length 1441
  1-TOP w12: Uc.38@513.53,129.47 550.47,129.47 v1@559,138
  3-SIGNAL w20: v1@-639,46 -359,326 374,326 v1(560,140)
  other v1: -645,46
PROG_NRST: Cnrst.2 P1.5 Rnrst.1 Uc.7 | length 849.5
  1-TOP w12: v1@895,50.47 Uc.7
  3-SIGNAL w20: v1@910,45 1085,-130 1085,-400 1050,-435 975,-435 P1.5@925,-385
  4-BOT w12: Cnrst.2@914,45 920,39 Rnrst.1
  other v1: 893,51
PROG_SWCLK: P1.2 Uc.49 | length 246.6
  1-TOP w12: Uc.49 582.36,-338.36 P1.2@621,-377
PROG_SWDIO: P1.4 Uc.46 | length 531.6
  1-TOP w12: Uc.46 545.27,-28.27 v1@561,-44
  3-SIGNAL w20: v1@555,-45 v1(565,-45) 825,-305 P1.4@825,-395
PROG_SWO: P1.6 Uc.55 | length 541.7
  1-TOP w12: v1@700,-95 700.47,-95.47 Uc.55
  3-SIGNAL w20: v1@705,-89 822,-89 1025,-292 P1.6 P1.6@1025,-378
  other v1: 699,-91
VBAT: ALIM.3 ALIM.5 BAT.2 SWpwr.NC1 | length 1241.1
  1-TOP w30: SWpwr.NC1@-875,350 -875,323 -693,141 -693,-77 -760,-144 ALIM.3@-823,-144
  1-TOP w50: BAT.2@-849.16,-603 -847,-603 ALIM.5@-677.5,-433.5 ; ALIM.3 -835.16,-205.84 -663,-378 ALIM.5@-663,-409
VBAT_NOJACK: ALIM.2 ALIM.4 SWpwr.COMMON1 | length 842.9
  1-TOP w35: SWpwr.COMMON1@-875,230 -875,205 -764,94 ALIM.2@-764,-39
  1-TOP w50: ALIM.4@-951,-422 -951,-101 -892.8,-42.8 ALIM.2
VBATP: Cin.2 Cmot.2 Dtransil.2 Rbat+.1 Rp.2 Umot.2 Umot.3 Umot.6 Ureg.1 | length 1202.1
  4-BOT w25: Umot.6@-604.51,98.51 -604.51,-62.49 -585,-82 ; Cmot.2@-604,-203 -574,-173
  4-BOT w50: Cmot.2@-605,-210 -605,-230 -505,-330 -435,-330 -379.33,-385.67 Dtransil.2 -489,-610 -496,-617 -468,-645 -468,-819 Ureg.1@-469,-820 ; Cmot.2@-585,-184 -585,-82
VDD_RC1240: RC1240.2 RC1240.3 RC1240.11 | length 1065.2
  1-TOP w12: RC1240.11@-277,895 RC1240.11@-270,888 ; RC1240.2 712.5,834.5 RC1240.3@717,839
  1-TOP w35: RC1240.11@-270,888 612,888 661.46,838.54 RC1240.3
pads on no net: "Led Bat.0" LedSyncG.0 LedSyncR.0 RC1240.0 RC1240.15 RC1240.16 RC1240.17 RC1240.18 RC1240.19 RC1240.20 RC1240.21 RC1240.23 RC1240.24 RC1240.25 RC1240.26 RC1240.27 RC1240.28 RC1240.29 RC1240.30 RledIR.3 Uc.2 Uc.3 Uc.4 Uc.8 Uc.9 Uc.10 Uc.11 Uc.16 Uc.17 Uc.20 Uc.23 Uc.24 Uc.25 Uc.27 Uc.28 Uc.33 Uc.34 Uc.35 Uc.36 Uc.39 Uc.40 Uc.43 Uc.50 Uc.51 Uc.52 Uc.53 Uc.54 Uc.61 Uc.62 V3.1

## Polygon pours and split planes (outlines as drawn)
GND on 4-BOT "4-GND" (solid, remove dead copper, pour order 5): -1044,1180 -779,1374 -477,1508 -155,1576 177,1576 496,1508 796,1375 1063,1181 1283,937 1449,650 1551,336 1585,11 1551,-315 1448,-633 1285,-915 1063,-1161 796,-1355 497,-1488 174,-1557 -156,-1556 -476,-1488 -778,-1354 -1045,-1160 -1264,-916 -1430,-629 -1531,-318 -1565,9 -1531,337 -1429,651 -1265,934
GND on 3-SIGNAL "3-GND" (solid, remove dead copper, pour order 6): -1044,1180 -779,1374 -477,1508 -155,1576 177,1576 496,1508 796,1375 1063,1181 1283,937 1449,650 1551,336 1585,11 1551,-315 1448,-633 1285,-915 1063,-1161 796,-1355 497,-1488 174,-1557 -156,-1556 -476,-1488 -778,-1354 -1045,-1160 -1264,-916 -1430,-629 -1531,-318 -1565,9 -1531,337 -1429,651 -1265,934
GND on 2-GND "2-GND" (solid, remove dead copper, pour order 7): -1044,1180 -779,1374 -477,1508 -155,1576 177,1576 496,1508 796,1375 1063,1181 1283,937 1449,650 1551,336 1585,11 1551,-315 1448,-633 1285,-915 1063,-1161 796,-1355 497,-1488 174,-1557 -156,-1556 -476,-1488 -778,-1354 -1045,-1160 -1264,-916 -1430,-629 -1531,-318 -1565,9 -1531,337 -1429,651 -1265,934
GND on 1-TOP "1-GND" (solid, remove dead copper, pour order 8): -1044,1180 -779,1374 -477,1508 -155,1576 177,1576 496,1508 796,1375 1063,1181 1283,937 1449,650 1551,336 1585,11 1551,-315 1448,-633 1285,-915 1063,-1161 796,-1355 497,-1488 174,-1557 -156,-1556 -476,-1488 -778,-1354 -1045,-1160 -1264,-916 -1430,-629 -1531,-318 -1565,9 -1531,337 -1429,651 -1265,934

## Keep-outs
Keep-Out Layer:
  lines w10: -1225.01,-567.32 ccw(c0,0) 619.68,1199.37 ; -1225,-565 -1225,-190 -1010,25 -1010,500 -1175,665 ; -1173.67,667.09 cw(c0,0) -619.68,1199.37 ; -620,1200 620,1200

## Other copper
1-TOP:
  pour cut-out: -340,1195 -340,735 -375,735 -555,555 -1076,555 -1185,664 -1185,825 -815,1195
2-GND:
  pour cut-out: -340,1195 -340,735 -375,735 -555,555 -1074,555 -1187,668 -1187,823 -815,1195
3-SIGNAL:
  pour cut-out: -340,1195 -340,735 -375,735 -555,555 -1076,555 -1186,665 -1186,824 -815,1195
4-BOT:
  pour cut-out: -340,1195 -340,735 -375,735 -555,555 -1076,555 -1185,664 -1185,825 -815,1195

## Silkscreen, mask and mechanical layers (free items; w line width, h text height)
Top Overlay:
  text "433MHz" at -745,887 h40
  text "Percer" at -1075,772 h40
  text "°" at -466,708 h30
  text "ici" at -1106,700 h40
  text "+" at -355,670 h40 r180
  text "3.5mm" at -1057,602 h40
  text "-" at -230,575 h40 r180
  text "=" at 197,521 h40 r180
  text "+" at -30,495 h40
  text "1n" at 785,478 h40 r90
  text "Small" at 971,465 h40
  text "°" at 888,431 h30
  text "=" at 1070,426 h40 r180
  text "2.2u" at 567,425 h40 r90
  text "LED IR" at -205,420 h40 r180
  text "=" at 1070,330 h40 r180
  text "Big" at 1173,329 h40 r20
  text "1n" at 305,279 h40
  text "°" at 1071,234 h30
  text "1n" at 992,228 h40
  text "Qz 8MHz" at 1149,127 h40 r270
  text "STM32F405" at 556,71 h40
  text "RGT6" at 599,8 h40
  text "17p" at 1038,-101 h40 r90
  text "°" at 559,-228 h30
  text "1n" at 714,-236 h40
  text "1n" at 1041,-237 h40 r270
  text "°" at 703,-296 h30
  text "2.2u" at 393,-320 h40 r90
  text "2224U012SR" at -188,-336 h40
  text "+ IE264" at -141,-407 h40
  text "Prog" at 314,-421 h40
  text "+" at 986,-501 h40 r270
  text "*" at 811,-513 h40 r270
  text "1M" at 954,-643 h40 r60
  text "=" at 923,-668 h40 r180
  text "Sync" at -1025,-705 h40 r310
  text "AdvBeacon" at -296,-853 h120
  text "ROBOT ESEO 2016" at -296,-954 h120
  text "Nirgal&Dorian" at -296,-1052 h120
  text "#" at -115,-1110 h40 r270
  text "100k" at -57,-1141 h40
  text "*" at -117,-1167 h40 r270
  text "BAT" at -615,-1180 h40 r335
  text "10k" at -57,-1197 h40
  text "+" at -118,-1226 h40 r270
  text "°" at 146,-1242 h30
  text "100n" at 223,-1250 h40
  text "1k" at -58,-1255 h40
  text "=" at -85,-1281 h40 r180
  text "100R" at -60,-1318 h40
Bottom Overlay:
  lines w10: -989,204 -966,204 ; -964,171 -964,202 -986,180 -986,44 -918,-24 -918,-113 ; -937,-358 -921,-374 -921,-282 ; -922,-171 -922,-113 -845,-36 -826,-36 -846,-16 ; -921,-373 -919,-373 -903,-357 ; -921,-285 -921,-110 ; -843,-51 -831,-39 -829,-39 ; -790,-172 -764,-172 ; -789,-201 -789,-174 -754,-209 -754,-279 ; -753,-312 -753,-349 -705,-397 -705,-372 -704,-371 ; -731,-397 -704,-397 ; -243,-1162 -243,-1133 ; -240,-1129 -211,-1129 ; -239,-1130 -98,-1271 279,-1271 ; -173,-652 -173,-623 ; -170,-619 -141,-619 ; -169,-620 -142,-647 208,-647 ; 128,-1058 128,-1029 ; 131,-1025 160,-1025 ; 132,-1026 202,-1096 617,-1096 679,-1034
  text "NMOS" at 439,1141 h40
  text "*" at 239,982 h40 r270
  text "=" at 545,535 h40 r180
  text "=" at -737,527 h40 r180
  text "=" at -546,527 h40 r180
  text "#" at 255,423 h40 r270
  text "A" at -735,416 h40
  text "CodB" at -385,400 h40
  text "Vbat" at -846,399 h40
  text "5V" at -717,348 h40
  text "GND" at -399,301 h40
  text "NMOS" at 480,296 h40
  text "°" at 855,270 h30
  text "°" at -813,165 h30
  text "MOT" at -586,141 h40
  text "°" at 958,105 h30
  text "#" at 900,-72 h40 r270
  text "noJack" at -935,-111 h40 r90
  text "Vbat" at -988,-160 h40 r90
  text "BD6221F-E2" at -449,-177 h40 r270
  text "1n" at 612,-216 h40
  text "Vbat" at -766,-230 h40 r90
  text "1u" at -651,-242 h40
  text "1n" at 576,-296 h40
  text "100p" at 1043,-297 h40
  text "1R-1W" at -584,-435 h40 r90
  text "150" at -1034,-451 h40
  text "*" at -160,-487 h40 r270
  text "SMA6J12CA" at 244,-625 h40
  text "150" at -948,-660 h40 r40
  text "°" at -243,-735 h30
  text "10u" at -512,-738 h40
  text "4.7u" at 266,-750 h40
  text "°" at 238,-978 h30
  text "150" at -621,-1006 h40
  text "MCP1826S" at 659,-1022 h40
  text "10u" at -208,-1069 h40 r270
  text "3302E/DB" at 517,-1081 h40
  text "MC7805BDTG" at 293,-1254 h40
Mechanical 15:
  circle w10: c0,0 r433.07
  circle w10: c0,0 r236.22
  circle w4: c0,0 r1377.95
  circle w4: c0,0 r1574.8

## Dimensions
1460,2680 to 430,2465 on Mechanical 15